# EAGLE board Amusing-Ammotragus.postroute (EAGLE 7.4.0)
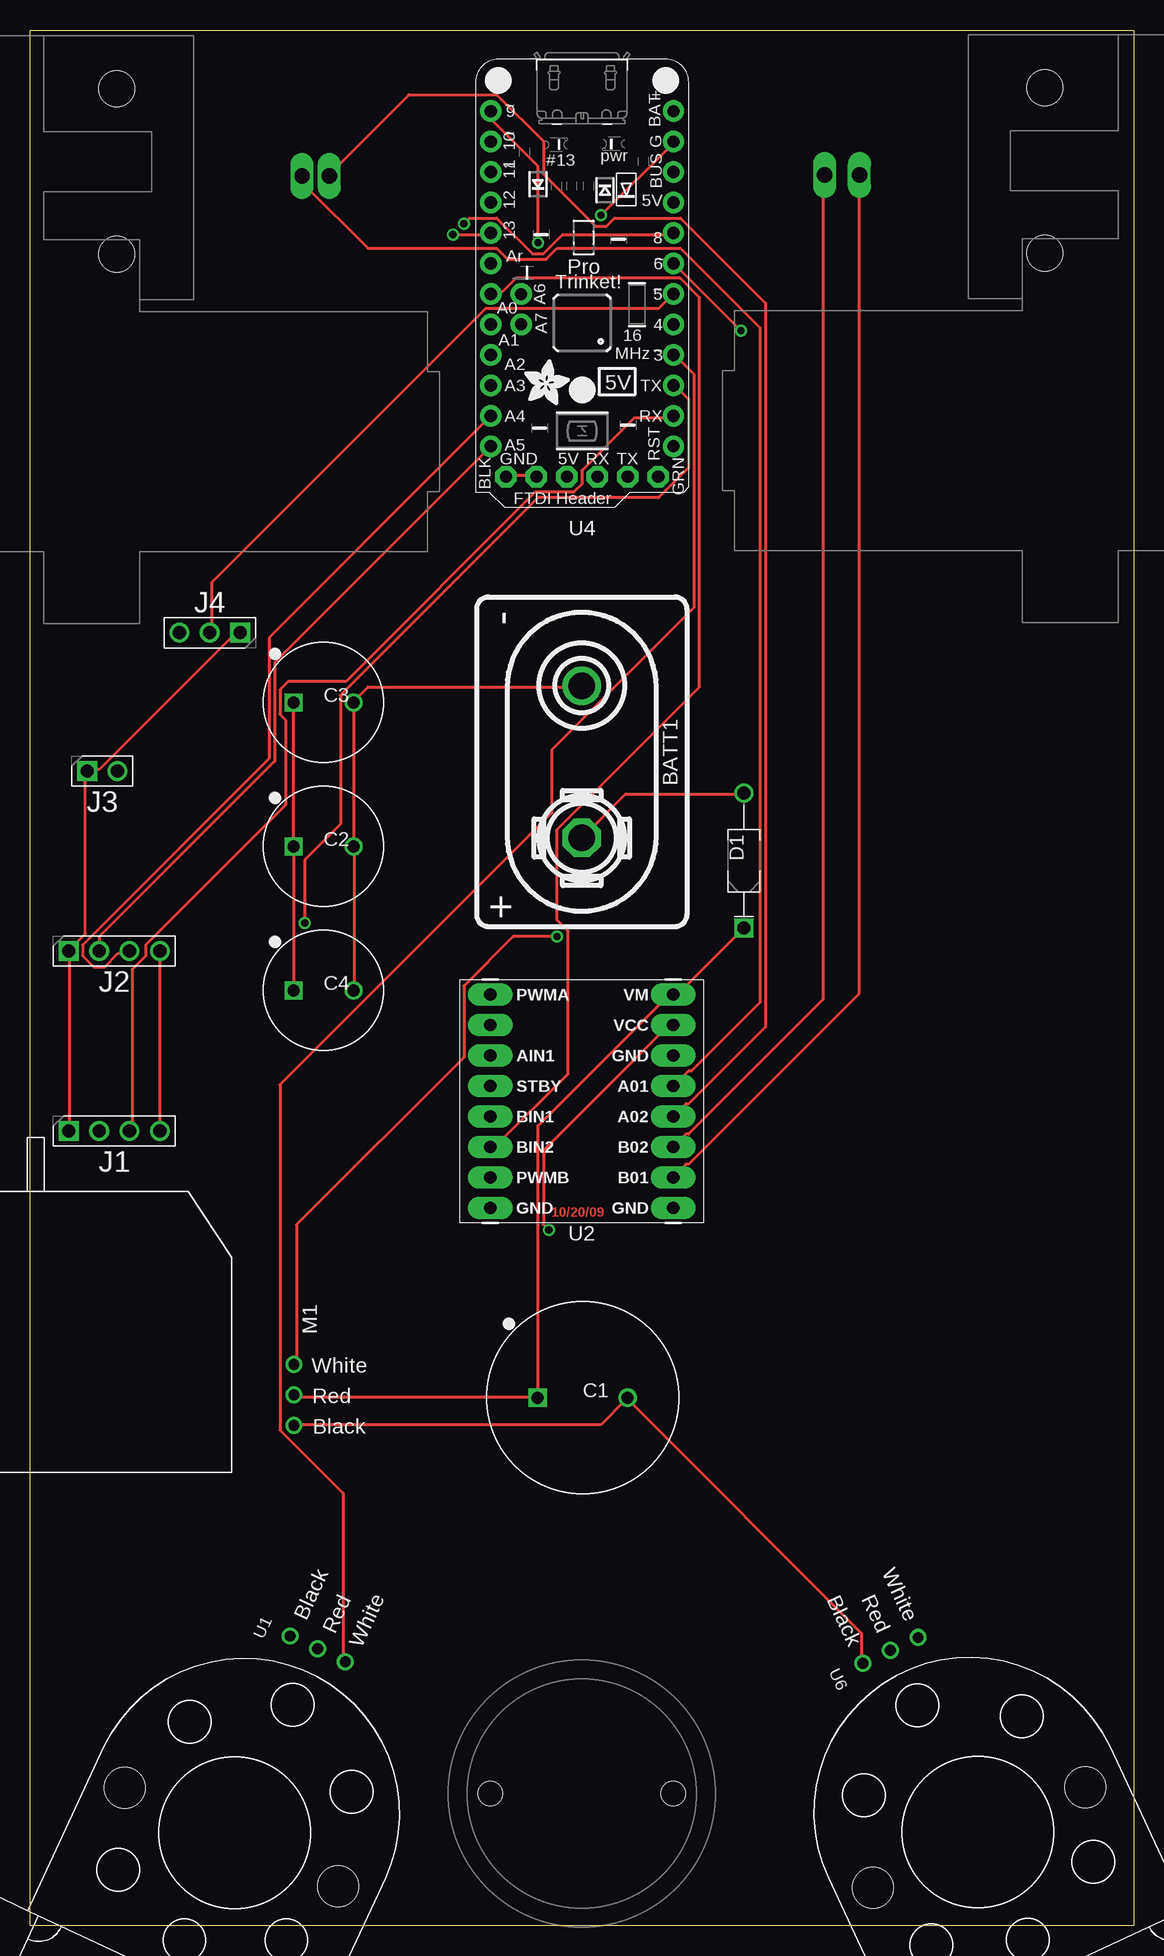
[diagram p0: board, top side]
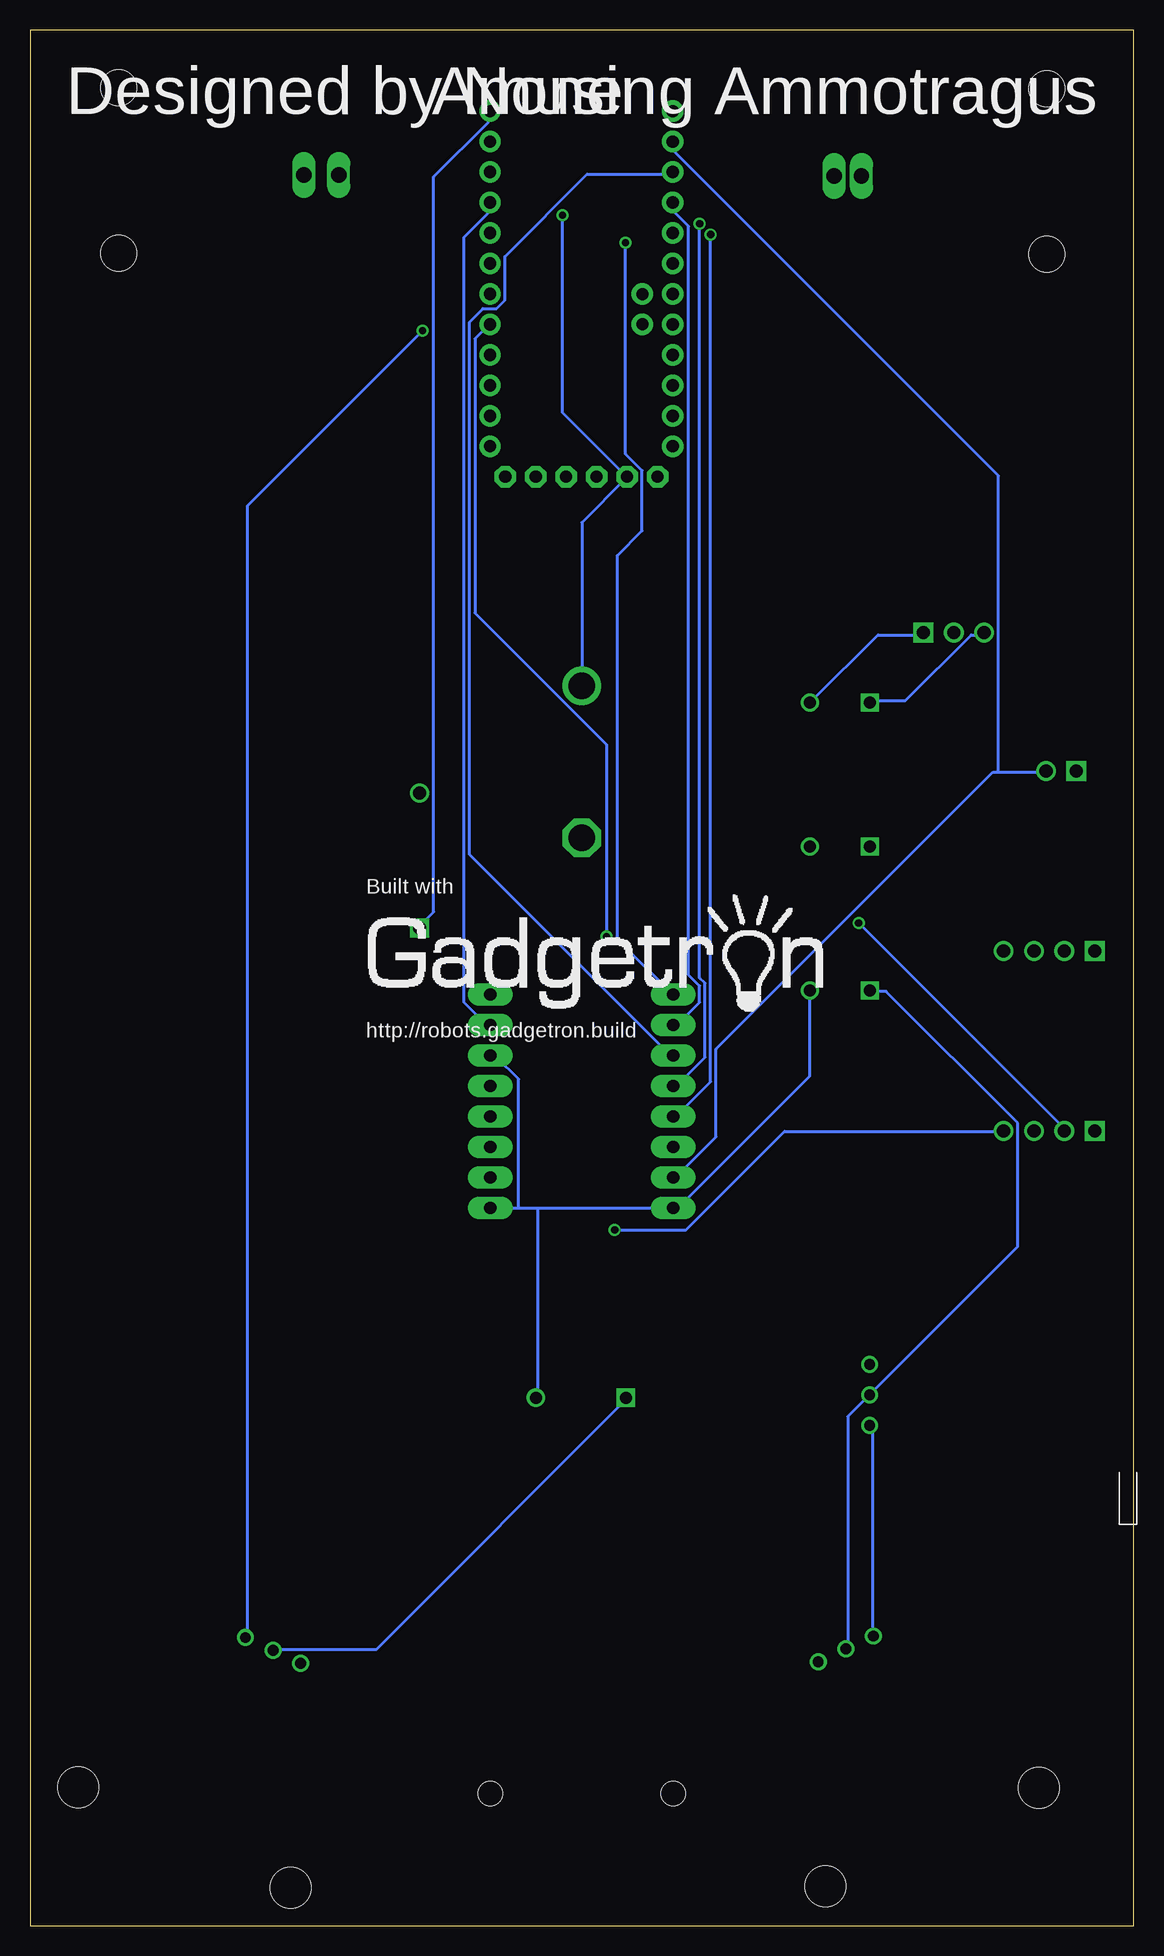
[diagram p1: board, bottom side, seen from below]

Size 92 x 158 mm. Coordinates in mm from the lower left corner, seen from the top.
Outline: 0,0 0,158 92,158 92,0 0,0
Copper layers (1*16): Top 0.035mm / dielectric 1.5mm / Bottom 0.035mm
Design rules "default": minimum track width 10mil, minimum drill 0.6mm, track to track 8mil, track to pad 8mil, pad to pad 8mil, via to via 8mil, smd to smd 8mil, copper to edge 40mil, drill to drill 8mil, minimum pad ring 10mil, minimum via ring 8mil, stop-mask expansion 4mil, vias tented up to drill 0mil, thermal gap 10mil

## Footprints (pad centres in the part's own frame; a part is rotated, then mirrored left to right if it is on the bottom)
BATTERY_9V_KEYSTONE_968 = drill 2.2: N 6.35,0 | drill 2.2 octagon: P -6.35,0
CAPPRD750W80D1600H2200P = drill 1 pad 1.5 square: 1 -3.75,0 | drill 1 pad 1.5: 2 3.75,0
CAPPRD500W80D1000H2200P = drill 1 pad 1.5 square: 1 -2.5,0 | drill 1 pad 1.5: 2 2.5,0
ADAFRUIT-3/4IN-CASTER = hole 2: -7.62,0; 7.62,0
DIOAD1125W78L520D270_HS = drill 1.06 pad 1.59: A 5.625,0 | drill 1.06 pad 1.59 square: C -5.625,0
HDRV4W63P254_4X1_1016X254H838_HS = drill 1.1 pad 1.65 square: 1 0,0 | drill 1.1 pad 1.65: 2 2.54,0; 3 5.08,0; 4 7.62,0
HDRV2W63P254_2X1_508X254H838_HS = drill 1.1 pad 1.65 square: 1 0,0 | drill 1.1 pad 1.65: 2 2.54,0
HDRV3W63P254_3X1_762X254H838_HS = drill 1.1 pad 1.65 square: 1 0,0 | drill 1.1 pad 1.65: 2 2.54,0; 3 5.08,0
SERVO_MICRO_SIDE_GLUE = drill 0.9: A1 8.97,-5.2; GND1 3.89,-5.2; PWR1 6.43,-5.2
MICRO_GRIPPER = drill 0.9: A1 2.54,41.91; GND1 -2.54,41.91; PWR1 0,41.91 | hole 3.4: -9.7,24.6; 9.9,24.7
SPARKFUN_DUAL_MOTOR_DRIVER = drill 1.016 pad 1.88 long: A01 7.62,1.27; A02 7.62,-1.27; AIN1 -7.62,3.81; AIN2 -7.62,6.35; B01 7.62,-6.35; B02 7.62,-3.81; BIN1 -7.62,-1.27; BIN2 -7.62,-3.81; GND -7.62,-8.89; GND1 7.62,3.81; GND2 7.62,-8.89; PWMA -7.62,8.89; PWMB -7.62,-6.35; STBY -7.62,1.27; VCC 7.62,6.35; VM 7.62,8.89
SOLARBOTICS_G2 = drill 1.27 long: + 40.545,-3.68; - 42.815,-3.68 | hole 3: 25.1,-10.2; 25.1,3.6
ADAFRUIT-PRO-TRINKET-5V = drill 1.016 pad 1.778: +5V 7.62,24.13; A0 -7.62,16.51; A1 -7.62,13.97; A2 -7.62,11.43; A3 -7.62,8.89; A4 -7.62,6.35; A5 -7.62,3.81; AREF -7.62,19.05; D3 7.62,11.43; D4 7.62,13.97; D5 7.62,16.51; D6 7.62,19.05; D8 7.62,21.59; D9 -7.62,31.75; D10 -7.62,29.21; D11 -7.62,26.67; D12 -7.62,24.13; D13 -7.62,21.59; GND2 7.62,29.21; RESET 7.62,3.81; RXD1 7.62,6.35; TXD1 7.62,8.89; VBAT 7.62,31.75; VBUS1 7.62,26.67 | drill 1 pad 1.778: A6 -5.08,16.51; A7 -5.08,13.97 | drill 1.016 pad 1.778 octagon: DTR/RTS 6.35,1.27; GND -6.35,1.27; GND1 -3.81,1.27; RXD 1.27,1.27; TXD 3.81,1.27; VBUS -1.27,1.27
SOLARBOTICS_G2_LEFT = drill 1.27 long: + -40.545,-3.68; - -43.45,-3.68 | hole 3: -25.1,-10.2; -25.1,3.6

## Placement (x,y rotation side)
BATT1  BATTERY-9V-VERTICAL  [BATTERY_9V_KEYSTONE_968]  46,97 90 top
C1  3300uF  [CAPPRD750W80D1600H2200P]  46.08,44 0 top
C2  1000uF  [CAPPRD500W80D1000H2200P]  24.47,89.95 0 top
C3  1000uF  [CAPPRD500W80D1000H2200P]  24.47,101.95 0 top
C4  1000uF  [CAPPRD500W80D1000H2200P]  24.47,77.95 0 top
CASTER1  CASTERADAFRUIT-3/4IN  [ADAFRUIT-3/4IN-CASTER]  46,11 0 top
D1  [DIOAD1125W78L520D270_HS]  59.52,88.77 90 top
J1  [HDRV4W63P254_4X1_1016X254H838_HS]  3.22,66.23 0 top
J2  [HDRV4W63P254_4X1_1016X254H838_HS]  3.22,81.23 0 top
J3  [HDRV2W63P254_2X1_508X254H838_HS]  4.76,96.23 0 top
J4  [HDRV3W63P254_3X1_762X254H838_HS]  17.53,107.77 180 top
LOGO  [BUILT_WITH_GADGETRON]  46,79 0 bottom
M1  SERVO-MICRO_SIDE_GLUE  [SERVO_MICRO_SIDE_GLUE]  16.8,37.79 90 top
U1  MICRO_GRIPPER  [MICRO_GRIPPER]  6.27,-14.93 335 top
U2  SPARKFUN_DUAL_MOTOR_DRIVER-BOB  [SPARKFUN_DUAL_MOTOR_DRIVER]  46,68.71 0 top
U3  SOLARBOTICS_GM2  [SOLARBOTICS_G2]  -17.86,149.51 0 top
U4  ADAFRUIT-PRO-TRINKET-5V-BOB  [ADAFRUIT-PRO-TRINKET-5V]  46.03,119.49 0 top
U5  SOLARBOTICS_GM2_LEFT  [SOLARBOTICS_G2_LEFT]  109.71,149.59 0 top
U6  MICRO_GRIPPER  [MICRO_GRIPPER]  89.45,-15.05 25 top

## Library data of the parts
BATT1 = Components; DIST: Digikey; DISTPN: 36-968-ND; HIERARCHY_NAME: battery.BATT1
C1 = KoalaBuild; DATASHEET: http://industrial.panasonic.com/www-cgi/jvcr13pz.cgi?E+PZ+3+ABA0012+ECA1EM332+7+WW; DATA_SHEET: http://industrial.panasonic.com/www-cgi/jvcr13pz.cgi?E+PZ+3+ABA0012+ECA1EM332+7+WW; DB: /Users/swanson/research/NVSL/src/with-git/gtron_devel/Gadgets/Tools/Koala/Koala/PartLibrary/Digikey/Capacitors-AluminumTH.csv; DEVICE: TH-RADIAL_ALUMINUM_16MM; DIST: Digikey; DISTPN: P5158-ND; HIERARCHY_NAME: drive.C1; IMAGE: http://media.digikey.com/Photos/Panasonic%20Photos/ECA-1CM472.jpg; MFR: Panasonic Electronic Components; MIN_QTY: 1; MPN: ECA-1EM332; PACKAGE: CAPPRD750W80D1600H2200P; PRICE: $1.13; SIZE: TH; STOCK: STOCK; TOL: 20%; VALUE_QUERY: >3000uF; VOLTS: ( >= 5)V
C2 = KoalaBuild; DATASHEET: http://industrial.panasonic.com/www-cgi/jvcr13pz.cgi?E+PZ+3+ABA0012+ECA1EM102+7+WW; DATA_SHEET: http://industrial.panasonic.com/www-cgi/jvcr13pz.cgi?E+PZ+3+ABA0012+ECA1EM102+7+WW; DB: /Users/swanson/research/NVSL/src/with-git/gtron_devel/Gadgets/Tools/Koala/Koala/PartLibrary/Digikey/Capacitors-AluminumTH.csv; DEVICE: TH-RADIAL_ALUMINUM_10MM; DIST: Digikey; DISTPN: P5156-ND; HIERARCHY_NAME: Servo.C1; IMAGE: http://media.digikey.com/Photos/Panasonic%20Photos/ECA-1AM102B.JPG; MFR: Panasonic Electronic Components; MIN_QTY: 1; MPN: ECA-1EM102; PACKAGE: CAPPRD500W80D1000H2200P; PRICE: $0.68; SIZE: TH; STOCK: STOCK; TOL: 20%; VALUE_QUERY: > 1000uF; VOLTS: ( >= 5)V
C3 = KoalaBuild; DATASHEET: http://industrial.panasonic.com/www-cgi/jvcr13pz.cgi?E+PZ+3+ABA0012+ECA1EM102+7+WW; DATA_SHEET: http://industrial.panasonic.com/www-cgi/jvcr13pz.cgi?E+PZ+3+ABA0012+ECA1EM102+7+WW; DB: /Users/swanson/research/NVSL/src/with-git/gtron_devel/Gadgets/Tools/Koala/Koala/PartLibrary/Digikey/Capacitors-AluminumTH.csv; DEVICE: TH-RADIAL_ALUMINUM_10MM; DIST: Digikey; DISTPN: P5156-ND; HIERARCHY_NAME: pincer.C1; IMAGE: http://media.digikey.com/Photos/Panasonic%20Photos/ECA-1AM102B.JPG; MFR: Panasonic Electronic Components; MIN_QTY: 1; MPN: ECA-1EM102; PACKAGE: CAPPRD500W80D1000H2200P; PRICE: $0.68; SIZE: TH; STOCK: STOCK; TOL: 20%; VALUE_QUERY: >1000uF; VOLTS: ( >= 5)V
C4 = KoalaBuild; DATASHEET: http://industrial.panasonic.com/www-cgi/jvcr13pz.cgi?E+PZ+3+ABA0012+ECA1EM102+7+WW; DATA_SHEET: http://industrial.panasonic.com/www-cgi/jvcr13pz.cgi?E+PZ+3+ABA0012+ECA1EM102+7+WW; DB: /Users/swanson/research/NVSL/src/with-git/gtron_devel/Gadgets/Tools/Koala/Koala/PartLibrary/Digikey/Capacitors-AluminumTH.csv; DEVICE: TH-RADIAL_ALUMINUM_10MM; DIST: Digikey; DISTPN: P5156-ND; HIERARCHY_NAME: pincer_2.C1; IMAGE: http://media.digikey.com/Photos/Panasonic%20Photos/ECA-1AM102B.JPG; MFR: Panasonic Electronic Components; MIN_QTY: 1; MPN: ECA-1EM102; PACKAGE: CAPPRD500W80D1000H2200P; PRICE: $0.68; SIZE: TH; STOCK: STOCK; TOL: 20%; VALUE_QUERY: >1000uF; VOLTS: ( >= 5)V
CASTER1 = Components; DIST: Adafruit; DISTPN: 1200; HIERARCHY_NAME: caster.u1
D1 = KoalaBuild; DATASHEET: http://www.st.com/web/en/resource/technical/document/datasheet/CD00001625.pdf; DATA_SHEET: http://www.st.com/web/en/resource/technical/document/datasheet/CD00001625.pdf; DB: /home/buildserver/gtron_devel/Gadgets/Tools/Koala/Koala/PartLibrary/Digikey/Schottky-Diodes-TH.csv; DEVICE: TH-DO-41-AND-DO-204AL; DIST: Digikey; DISTPN: 497-4547-1-ND; HIERARCHY_NAME: battery.D1; IMAGE: http://media.digikey.com/photos/STMicro%20Photos/1N5819.JPG; IRECT: 1A; MFR: STMicroelectronics; MIN_QTY: 1; MPN: 1N5817; PACKAGE: DIOAD1125W78L520D270_HS; PRICE: $0.57; SIZE: TH; STOCK: STOCK; VALUE: 450mV; VREV: 20V
J1 = Components; DIST: Digikey; DISTPN: S7002-ND; HIERARCHY_NAME: i2c_2.J1; PIN1: GND; PIN2: RX; PIN3: TX; PIN4: VCC
J2 = Components; DIST: Digikey; DISTPN: S7002-ND; HIERARCHY_NAME: i2c.J1; PIN1: GND; PIN2: SDC; PIN3: SDA; PIN4: VCC
J3 = Components; DIST: Digikey; DISTPN: S7000-ND; HIERARCHY_NAME: pwm.J1; PIN1: GND; PIN2: PWM1
J4 = Components; DIST: Digikey; DISTPN: 3M9448-ND; HIERARCHY_NAME: Servo_2.J1; PIN1: GND; PIN2: DATA; PIN3: VCC
LOGO = Artwork
M1 = Components; DIST: Gadgetron; DISTPN: side-servo; HIERARCHY_NAME: Servo.U1
U1 = Components; DIST: Sparkfun; DISTPN: 13176-assembly; HIERARCHY_NAME: pincer.U1
U2 = BOBs; DIST: Sparkfun; DISTPN: 9457; HIERARCHY_NAME: drive.DRVR
U3 = Components; DIST: Solarbotics; DISTPN: gm2-assembly; HIERARCHY_NAME: drive.R
U4 = BOBs; DIST: Adafruit; DISTPN: 2000; HIERARCHY_NAME: brain.U1
U5 = Components; DIST: Solarbotics; DISTPN: gm2-assembly; HIERARCHY_NAME: drive.L
U6 = Components; DIST: Sparkfun; DISTPN: 13176-assembly; HIERARCHY_NAME: pincer_2.U1

## Nets
+5V_0_BRAIN: J1.4 J2.4 U2.VCC U4.+5V
A0_0_BRAIN: U2.BIN2 U4.A0
A1_0_BRAIN: U4.A1
A01_2_DRIVE: U2.A01 U3.+
A2_0_BRAIN: U4.A2
A02_2_DRIVE: U2.A02 U3.-
A3_0_BRAIN: U4.A3
A4_0_BRAIN: J2.3 U4.A4
A5_0_BRAIN: J2.2 U4.A5
A6_0_BRAIN: U4.A6
A7_0_BRAIN: U4.A7
AREF_0_BRAIN: U4.AREF
B01_2_DRIVE: U2.B01 U5.+
B02_2_DRIVE: U2.B02 U5.-
D3_0_BRAIN: U1.A1 U4.D3
D4_0_BRAIN: M1.A1 U4.D4
D5_0_BRAIN: J4.2 U4.D5
D6_0_BRAIN: U4.D6 U6.A1
D8_0_BRAIN: U2.STBY U4.D8
D9_0_BRAIN: U2.PWMA U4.D9
D10_0_BRAIN: J3.2 U2.PWMB U4.D10
D11_0_BRAIN: U2.AIN1 U4.D11
D12_0_BRAIN: U2.AIN2 U4.D12
D13_0_BRAIN: U2.BIN1 U4.D13
DTR/RTS_0_BRAIN: U4.DTR/RTS
GND_0_BRAIN: BATT1.N C1.2 C2.2 C3.2 C4.2 J1.1 J2.1 J3.1 J4.1 M1.GND1 U1.GND1 U2.GND U2.GND1 U2.GND2 U4.GND U4.GND1 U4.GND2 U6.GND1
N$1_1_BATTERY: BATT1.P D1.A
POS_1_BATTERY: C1.1 C2.1 C3.1 C4.1 D1.C J4.3 M1.PWR1 U1.PWR1 U2.VM U4.VBAT U6.PWR1
RESET_0_BRAIN: U4.RESET
RXD1_0_BRAIN: J1.3 U4.RXD1
RXD_0_BRAIN: U4.RXD
TXD1_0_BRAIN: J1.2 U4.TXD1
TXD_0_BRAIN: U4.TXD
VBUS1_0_BRAIN: U4.VBUS1
VBUS_0_BRAIN: U4.VBUS

## Tracks (layer width: path | path; a pad name or v marks a point on that pad's centre or on a via)
+5V_0_BRAIN  (via drill 0.6)
  Top 0.254: v43.26,57.97 42.8,58.43 42.8,64.6 53.09,74.89 53.54,74.89 U2.VCC | J1.4 10.8,66.43 10.8,81.06 J2.4
  Bottom 0.254: v43.26,57.97 37.31,57.97 29.08,66.2 11.02,66.2 J1.4 | U2.VCC 53.77,74.89 55.83,76.94 55.83,140.72 53.77,142.78 53.77,143.47 U4.+5V
A0_0_BRAIN
  Top 0.254: U2.BIN2 38.46,65.06 38.91,65.06 44.86,71 44.86,82.89 43.94,83.8 43.94,91.34 55.83,103.23 55.83,135.69 54.23,137.29 40.51,137.29 39.37,136.15 38.46,136.15 U4.A0
A01_2_DRIVE
  Top 0.254: U3.+ 22.91,145.75 22.91,145.06 28.17,139.81 38.91,139.81 39.83,138.89 43.03,138.89 43.94,139.81 54.23,139.81 60.86,133.18 60.86,76.94 55.14,71.23 54.91,71.23 53.77,70.09 U2.A01
A02_2_DRIVE
  Top 0.254: U3.- 24.97,145.98 31.6,152.61 38.91,152.61 42.8,148.72 42.8,145.98 47.14,141.64 48.06,141.64 48.74,142.32 54.23,142.32 61.32,135.24 61.32,74.89 54.91,68.48 54.69,68.48 53.77,67.57 U2.A02
A4_0_BRAIN
  Top 0.254: J2.3 8.28,81.06 7.37,81.06 6.22,79.91 5.31,79.91 4.4,80.83 4.4,81.74 19.94,97.29 19.94,107.35 38.23,125.63 U4.A4
A5_0_BRAIN
  Top 0.254: J2.2 5.77,81.29 5.77,82.43 20.4,97.06 20.4,105.29 38.23,123.12 U4.A5
B01_2_DRIVE
  Top 0.254: U5.+ 69.09,145.75 69.09,77.63 54.91,63.45 54.69,63.45 53.77,62.54 U2.B01
B02_2_DRIVE
  Top 0.254: U5.- 66.12,145.75 66.12,77.17 54.91,65.97 54.69,65.97 53.77,65.06 U2.B02
D3_0_BRAIN
  Top 0.254: U1.A1 26.11,22.08 26.11,36.02 20.85,41.28 20.85,70.09 43.48,92.72 43.48,97.97 55.37,109.86 55.37,129.29 53.77,130.89 U4.D3
D4_0_BRAIN  (via drill 0.6)
  Top 0.254: v43.94,82.43 40.28,82.43 36.17,78.31 36.17,72.37 22.23,58.43 22.23,46.77 M1.A1
  Bottom 0.254: v43.94,82.43 43.94,98.43 54.91,109.4 54.91,132.26 53.77,133.41 U4.D4
D5_0_BRAIN
  Top 0.254: J4.2 15.14,107.8 15.14,111.92 38,134.78 52.4,134.78 53.54,135.92 U4.D5
D6_0_BRAIN  (via drill 0.6)
  Top 0.254: v59.26,132.95 53.77,138.44 U4.D6
  Bottom 0.254: v59.26,132.95 73.89,118.32 73.89,24.14 U6.A1
D8_0_BRAIN  (via drill 0.6)
  Top 0.254: v36.17,141.87 36.63,142.32 38.91,142.32 41.88,139.35 42.8,139.35 44.4,140.95 53.54,140.95 U4.D8
  Bottom 0.254: U2.STBY 38.23,69.86 35.71,72.37 35.71,78.54 36.17,79 v36.17,141.87
D9_0_BRAIN  (via drill 0.6)
  Top 0.254: v42.34,140.26 42.34,146.67 38.46,150.55 38.46,151.24 U4.D9
  Bottom 0.254: v42.34,140.26 42.34,122.66 40.97,121.29 40.97,116.26 43.03,114.2 43.03,82.2 38.46,77.63 U2.PWMA
D10_0_BRAIN
  Bottom 0.254: 11.25,96.14 11.71,96.14 34.8,73.06 34.8,65.74 38.23,62.31 U2.PWMB | 11.25,96.14 11.25,120.83 38.23,147.81 38.23,148.49 U4.D10 | 11.25,96.14 7.37,96.14 J3.2
D11_0_BRAIN
  Bottom 0.254: U2.AIN1 38.46,72.37 55.37,89.29 55.37,133.63 54.23,134.78 53.09,134.78 52.4,135.46 52.4,139.12 45.54,145.98 38.46,145.98 U4.D11
D12_0_BRAIN
  Bottom 0.254: U2.AIN2 38.23,74.89 36.17,76.94 36.17,78.31 37.09,79.23 37.09,141.64 38.23,142.78 38.23,143.47 U4.D12
D13_0_BRAIN  (via drill 0.6)
  Top 0.254: v35.26,140.95 38.23,140.95 U4.D13
  Bottom 0.254: v35.26,140.95 35.26,70.31 38.23,67.34 U2.BIN1
GND_0_BRAIN  (via drill 0.6)
  Top 0.254: C4.2 27.03,78.09 27.03,89.74 C2.2 27.03,89.97 27.03,101.86 C3.2 27.03,102.09 28.17,103.23 46,103.23 BATT1.N | M1.GND1 22.23,41.74 47.6,41.74 49.66,43.8 C1.2 49.89,43.8 69.32,24.37 69.32,22.08 U6.GND1 | J4.1 17.43,107.58 16.97,107.58 5.77,96.37 4.85,96.37 J3.1 4.62,96.14 4.62,82.66 3.25,81.29 J2.1 3.25,81.06 3.25,66.43 J1.1 | U4.GND1 42.11,120.83 39.83,120.83 U4.GND | v47.6,142.55 53.54,148.49 U4.GND2
  Bottom 0.254: C4.2 27.03,77.86 27.03,70.77 37.77,60.03 38.23,60.03 U2.GND 38.46,59.8 49.66,59.8 | C3.2 26.8,102.09 21.31,107.58 17.65,107.58 J4.1 | M1.GND1 22,41.51 21.77,41.28 21.77,24.14 U1.GND1 | BATT1.N 46,116.95 42.34,120.6 U4.GND1 42.34,120.83 47.6,126.09 v47.6,142.55 | 49.66,59.8 49.66,44.02 C1.2 | 51.26,59.8 49.66,59.8 | 51.26,59.8 51.26,70.54 53.09,72.37 53.54,72.37 U2.GND1 | 51.26,59.8 53.54,59.8 U2.GND2
N$1_1_BATTERY
  Top 0.254: BATT1.P 49.66,94.32 59.49,94.32 D1.A
POS_1_BATTERY
  Top 0.254: M1.PWR1 22.23,44.02 42.11,44.02 C1.1 42.34,44.02 42.34,66.66 53.09,77.4 53.54,77.4 U2.VM 53.77,77.4 59.49,83.11 D1.C | C4.1 22,78.09 22,89.74 C2.1 22,89.97 22,101.86 C3.1
  Bottom 0.254: U1.PWR1 23.83,23.22 23.83,42.42 22.23,44.02 M1.PWR1 22,44.25 9.65,56.6 9.65,66.88 20.62,77.86 21.77,77.86 C4.1 | C3.1 21.77,102.09 19.02,102.09 13.54,107.58 12.62,107.58 J4.3 | C1.1 42.34,43.8 63.14,22.99 71.6,22.99 U6.PWR1 | D1.C 59.49,83.34 58.34,84.49 58.34,145.75 53.77,150.32 53.77,151.24 U4.VBAT
RXD1_0_BRAIN
  Top 0.254: J1.3 8.51,66.43 8.51,79.69 9.65,80.83 9.65,81.74 21.31,93.4 21.31,100.49 20.85,100.95 20.85,103 21.54,103.69 26.34,103.69 42.11,119.46 45.31,119.46 46,120.15 46,121.29 50.34,125.63 53.54,125.63 U4.RXD1
TXD1_0_BRAIN  (via drill 0.6)
  Top 0.254: v22.91,83.57 22.91,88.83 25.88,91.8 25.88,102.55 42.34,119 52.4,119 54.91,121.52 54.91,127.23 53.77,128.38 U4.TXD1
  Bottom 0.254: v22.91,83.57 5.77,66.43 J1.2

## Text on the board
bPlace: Amusing Ammotragus | Designed by None